# Altium PCB lm2576TO263-5.PcbDoc
Units mm, origin at the board's own origin, x right, y up, seen from the top; angles counter-clockwise.
Board outline 38 x 26 mm, 2 copper layers (Top Layer, Bottom Layer); 8 components, 5 nets, 35 pads, 0 vias.
Unrouted connection lines stored in the file: 15.
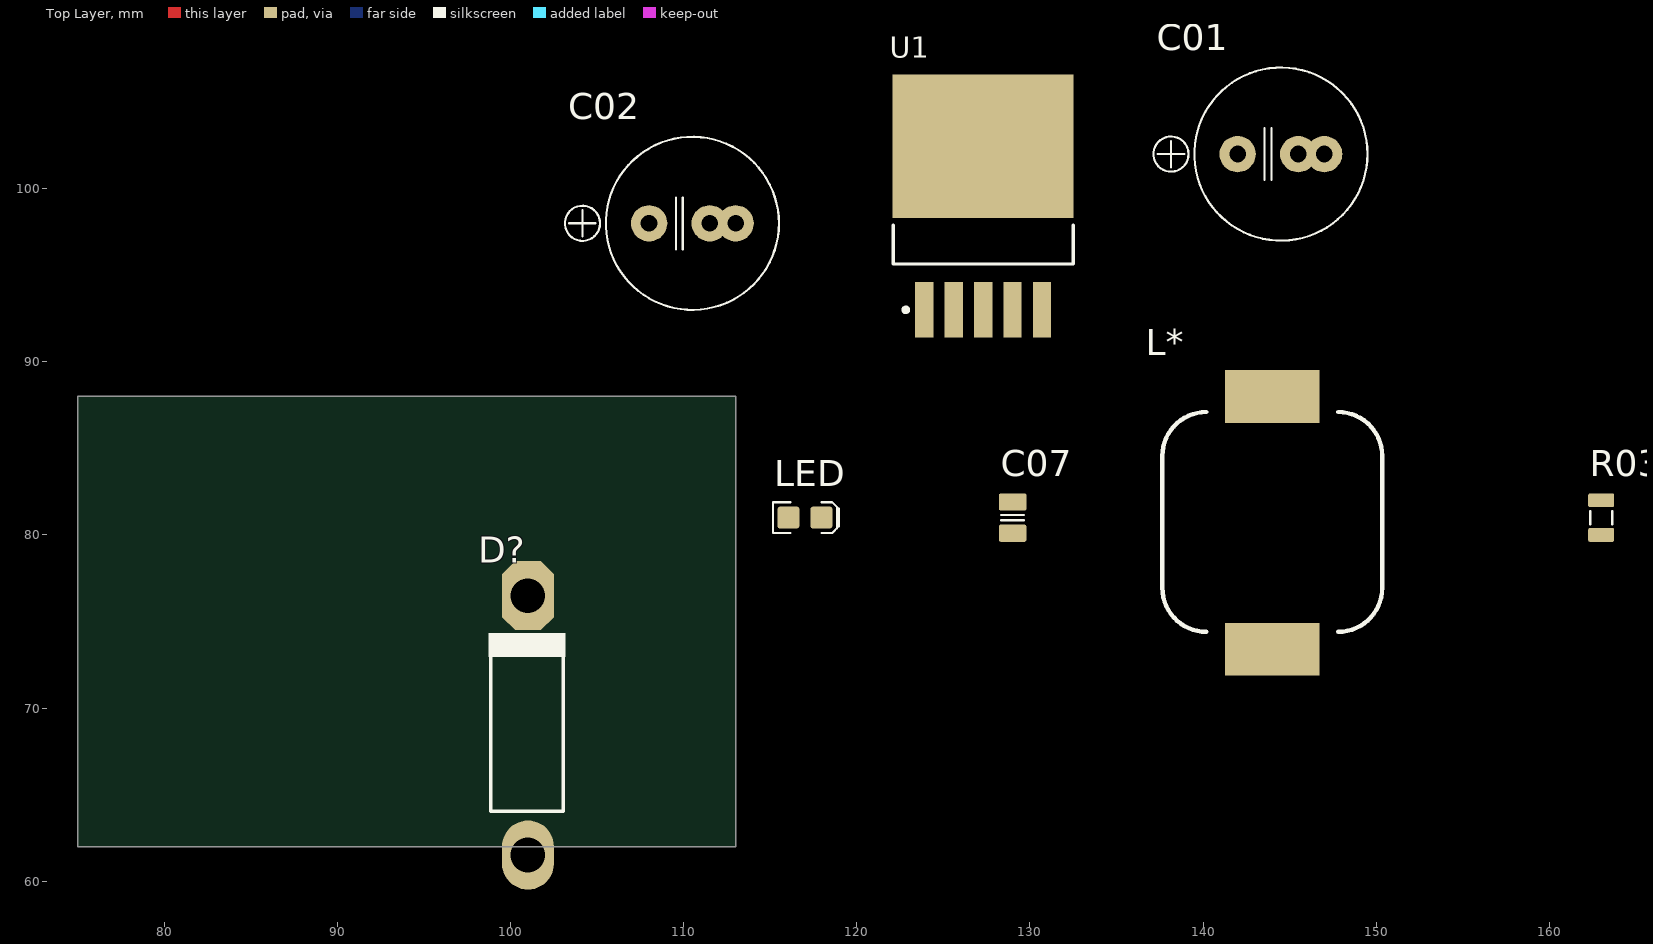
[diagram p0: Top Layer view]
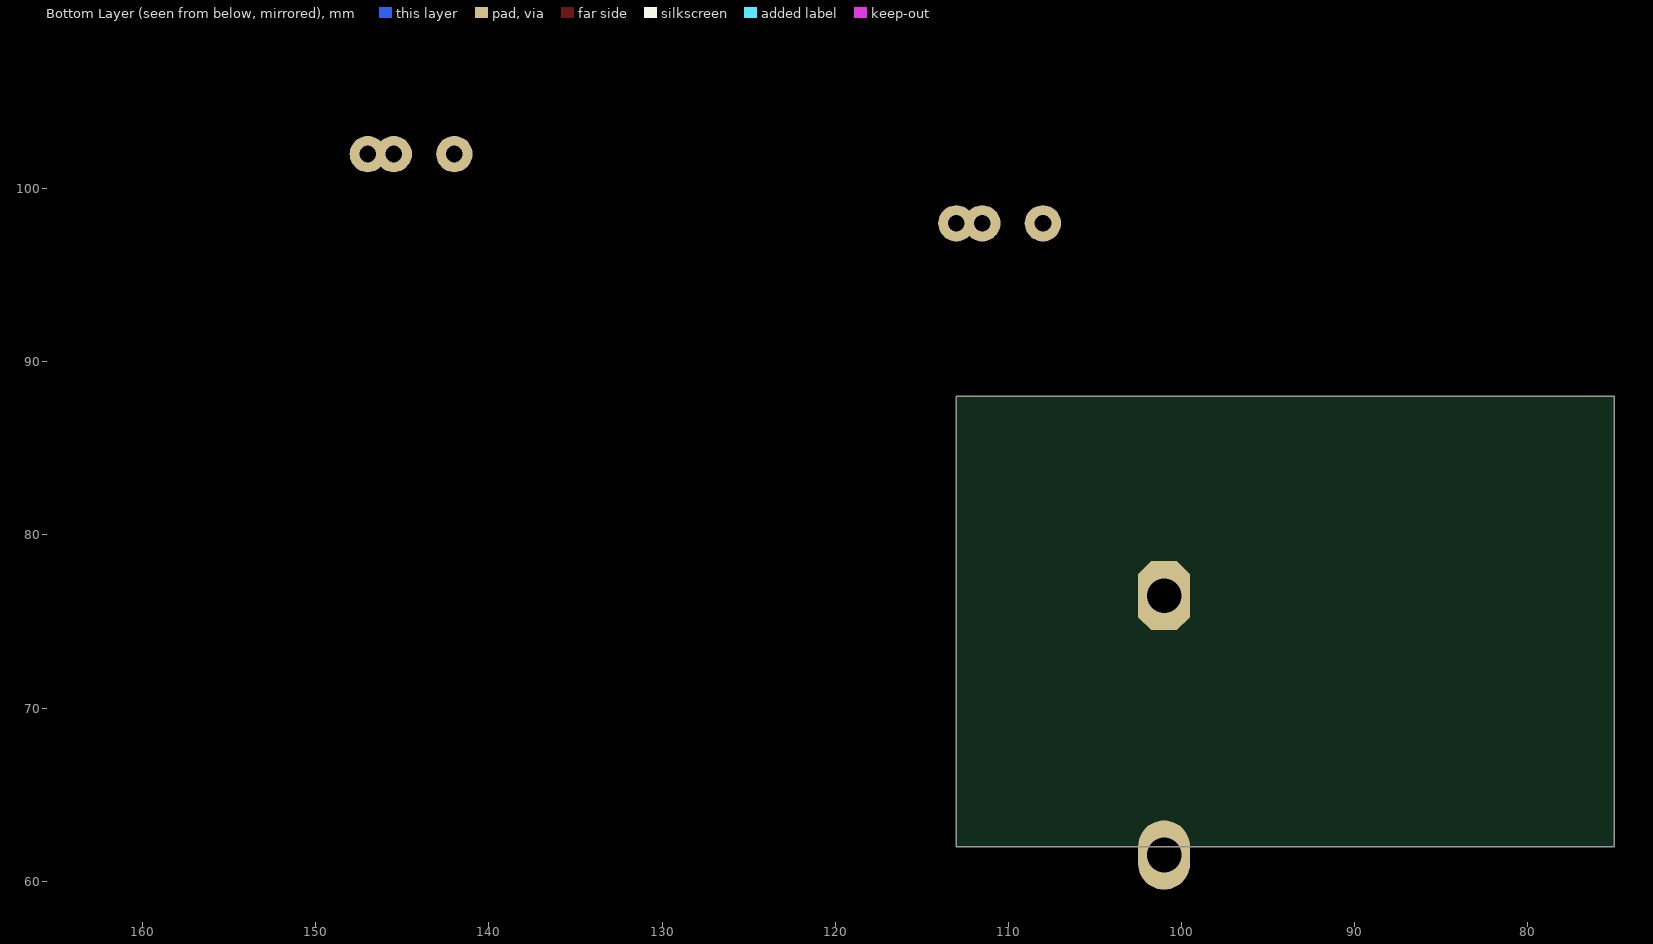
[diagram p1: Bottom Layer view, seen from below]

## Layer stack, top to bottom
Top Solder: solder mask 0.0102, Solder Resist, Dk 3.5
Top Layer: signal copper 0.0356
Dielectric1: dielectric 0.32, FR-4, Dk 4.8
Bottom Layer: signal copper 0.0356
Bottom Solder: solder mask 0.0102, Solder Resist, Dk 3.5

## Board outline
75,62 113,62 113,88 75,88

## Design rules (kind name [scope] priority, off if disabled: settings)
Clearance [All] p1: gap=0.5 ignorepadtopadclearanceinfootprint=FALSE except(0: Arc-Hole Track-Hole SMDPad-Hole THPad-Hole Via-Hole Fill-Hole Poly-Hole Region-Hole Text-Hole)
PlaneClearance [All] p1: clearance=0.5
PlaneConnect [All] p1: planeconnectstyle=Relief reliefexpansion=0.5 reliefentries=4 reliefconductorwidth=0.5 reliefairgap=0.2
PolygonConnect [All] p1: connectstyle=Relief reliefconductorwidth=0.5 reliefentries=4 polygonreliefangle="90 Angle" airgapwidth=0.2
RoutingVias [All] p1: holewidth=0.7 width=1.3 viastyle="Through Hole" minholewidth=0.6 minwidth=1.1 maxholewidth=5 maxwidth=5
SilkToSolderMaskClearance SilkscreenOverComponentPads [IsPad] p1: minsilkscreentomaskgap=0.254 clearancetoexposedcopper=TRUE
SolderMaskExpansion [All] p1: expansion=0.102
Width [All] p1: maxlimit=5 minlimit=0.5 preferedwidth=0.5
27 further rules are at their usual default settings.

## Components (designator, comment, footprint, x,y, rotation, side; value= is the part's Value field where it differs from the comment)
C01 "Tụ nhôm cắm35V/220uF" CAPE3.5-5.0MM_Rad_10x14mm 144.5,102 r0 top value=35V/220uF
C02 "Tụ nhôm cắm35V/220uF" CAPE3.5-5.0MM_Rad_10x14mm 110.5,98 r0 top value=35V/220uF
C07 "Tụ điện dán 0805104" CAPC2012N_F 129,81 r90 top value=104
D? "Đi ốt cắm1N5822" DO-201 101,69 r90 top value=1N5822
L* "Inductor" "Inductor 12x12x6" 150.35,74.4 r90 top value=100uH
LED "Blue" LED-0805-K 117,81 r0 top
R03 "Điện trở dán 0805330R" RESC2012N_F 163,81 r90 top value=330R
U1 "LM2576-5V" TS5B_N 127.3,99 r90 top

## Footprints (in the part's own frame and the unit in brackets; to place one, negate y for a bottom-side part, rotate by r counter-clockwise, add the part's x,y. Pads: shape width x height; smd on the part's side, far side on the other; paste and mask are expansions set on the pad)
CAPC2012N_F [mm] "Chip Capacitor, Body 2.0x1.2mm, 0805, IPC Medium Density, for Flex circuits"
  round 0.254 on Mech14: 0(0,0)
  rrect25% 1.2x1.4 on Top Solder: 1(-0.9,0) 1(0.9,0)
  rrect25% 1x1.6 smd paste-1: 1(-0.9,0) 2(0.9,0)
  rrect25% 1x1.4 on Top Paste: 1(-0.9,0) 1(0.9,0)
  Top Layer pour cut-out: -0.4,0.8 0.4,0.8 0.4,-0.8 -0.4,-0.8
  silkscreen extent -0.15,-0.65 0.15,0.65, body extent -1.1,-0.72 1.1,0.73, height 1.34
CAPE3.5-5.0MM_Rad_10x14mm [mm] "3.5 & 5.0mm Pitch Radial Capacitor 10x14mm DxH"
  round 0.5 on Mech14: 0(0,0)
  round 2.1 hole 0.965: 1(-2.5,0) 2(1,0) 2(2.5,0)
  silkscreen extent -7.36,-5 5,5, body extent -5.25,-5.24 5.21,5.24, height 13.99
DO-201 [mm] "Diode THT DO-201"
  oval 4x3 hole 2: A(-7.493,0)
  oct 4x3 hole 2: K(7.493,0)
  silkscreen extent -4.95,-2.16 5.33,2.29, body extent -8.15,-2.65 8.15,2.65, height 6.3
"Inductor 12x12x6" [mil]
  rect 120x215 smd: 1(-39.37,250) 2(535.43,250)
  silkscreen extent 0,0 500,500, body extent -50,-47 544,547, height 356
LED-0805-K [mil]
  round 20 on Mech14: 0(0,0)
  rrect25% 50x50 smd: A(-37.5,0) K(37.5,0)
  Top Layer pour cut-out: -15,30 15,30 15,-30 -15,-30
  silkscreen extent -72,-35 77,35, body extent -39,-25 39,25, height 31
RESC2012N_F [mm] "Chip Resistor, Body 2.0x1.2mm, 0805, IPC Medium Density"
  round 0.254 on Mech14: 0(0,0)
  rrect25% 1x1.3 on Top Solder: 1(-1,0) 1(1,0)
  rrect25% 0.8x1.5 smd paste-1: 1(-1,0) 2(1,0)
  rrect25% 0.8x1.3 on Top Paste: 1(-1,0) 1(1,0)
  Top Layer pour cut-out: -0.6,0.75 0.6,0.75 0.6,-0.75 -0.6,-0.75
  silkscreen extent -0.38,-0.64 0.38,0.64, body extent -1.1,-0.67 1.1,0.68, height 0.69
TS5B_N [mm] "D2-PAK, 6-Leads, Body 8.6x10.2mm, Pitch 1.7mm, Lead Span 14.1mm, IPC Medium Density"
  rect 3.2x1.05 smd: 1(-6,3.4) 2(-6,1.7) 3(-6,0) 4(-6,-1.7) 5(-6,-3.4)
  rect 8.3x10.45 smd: 6(3.45,0)
  silkscreen extent -6.12,-5.2 -1.1,5.2, body extent -3.35,-5.2 6.05,5.2, height 4.65

## Part data
C01 C02: library part Cap, cm="T? nhôm c?m"
C07: library part "CAP NP", "Capacitor non polarized", cm1="T? di?n dán 0603", cm2="T? di?n dán 0805", cm3="T? di?n dán 1206"
D?: library part "Schottky Diodes", "Schottky Diodes Through Hole 3 A 40 V Schottky Diodes, DO-201AD, SB340 ,MBR340", cm1="Ði ?t c?m", cm2="Ði ?t dán"
LED: library part LED_SMD_Blue_0805_100mcd, "LED 0805 SMD Blue 100mcd 470nm", Manufacturer 1=Ligitek, Manufacturer Part Number 1=LG-170DBKZ-CT, Package / Case=0805, Ratings="100 mcd; 470 nm", Color=Blue, Material=InGaN/GaN
R03: library part Res, "Resistor", cm1="Ði?n tr? dán 0603", cm2="Ði?n tr? c?m 1/4W", cm3="Ði?n tr? dán 0805", cm4="Ði?n tr? dán 1206"
U1: library part LM2596S-ADJ, "SIMPLE SWITCHER Power Converter 150 KHz 3A Step-Down Voltage Regulator", DigiKeyPartNumber=LM2596S-ADJ-ND, Manufacturer="National Semiconductor", PackageTopMarking="NSUZXYTT*LM2596S*-ADJ P+", PowerWise=N, Code_JEDEC=MO-169-AB, ComponentLink1Description="LM2596 Datasheet", ComponentLink1URL=http://www.national.com/ds/LM/LM2596.pdf, ComponentLink2Description="LM2596 Web Page", ComponentLink2URL=http://www.national.com/pf/LM/LM2596.html, ComponentLink3Description="TS5B Package Page", ComponentLink3URL=http://www.national.com/packaging/folders/ts5b.html, CompType=Switcher, DatasheetVersion=May-2002, FirstPublished=4-Dec-2008, PackageDescription="TO-263, Molded, .400 x .390 x .180in, 5 Lead, .067in Pitch, Surface Mount", PackageReference=TS5B, PackageVersion="revD, Apr-2005", PartNumber=LM2576-5V, PinCount=5, Publisher="Altium Limited", RoHS=O

## Nets (pads, with @x,y where several pads share a name; then routed paths per layer and width w, separated by ;. In a path a pad name is that pad's centre, name@x,y a point inside that pad or via, vN(x,y) a via of type N, cw(c..) or ccw(c..) an arc to the next point about the centre after c; other vN are vias at no path point)
+5V: C02.1 C07.2 L*.2 R03.2 U1.4
GND: C01.2 C02.2 C07.1@129,80.1 D?.A LED.K U1.3 U1.5 U1.6
NetD?_K: D?.K L*.1 U1.2
NetLED_A: LED.A R03.1@163,80
VIN: C01.1 U1.1
pads on no net: C01.0 C02.0 C07.0 C07.1@129,80.1 C07.1@129,81.9 LED.0 R03.0 R03.1@163,80 R03.1@163,82